# Altium PCB CAN-to-CAN.PcbDoc (part 2 of 2)
Units mil, origin at the board's own origin, x right, y up, seen from the top; angles counter-clockwise.
Board outline 4494 x 3585 mil, 4 copper layers (Top Layer, +5V, GND, Bottom Layer), stack 23.756 mil thick; 112 components, 87 nets, 365 pads, 245 vias.
Unrouted connection lines stored in the file: 3.
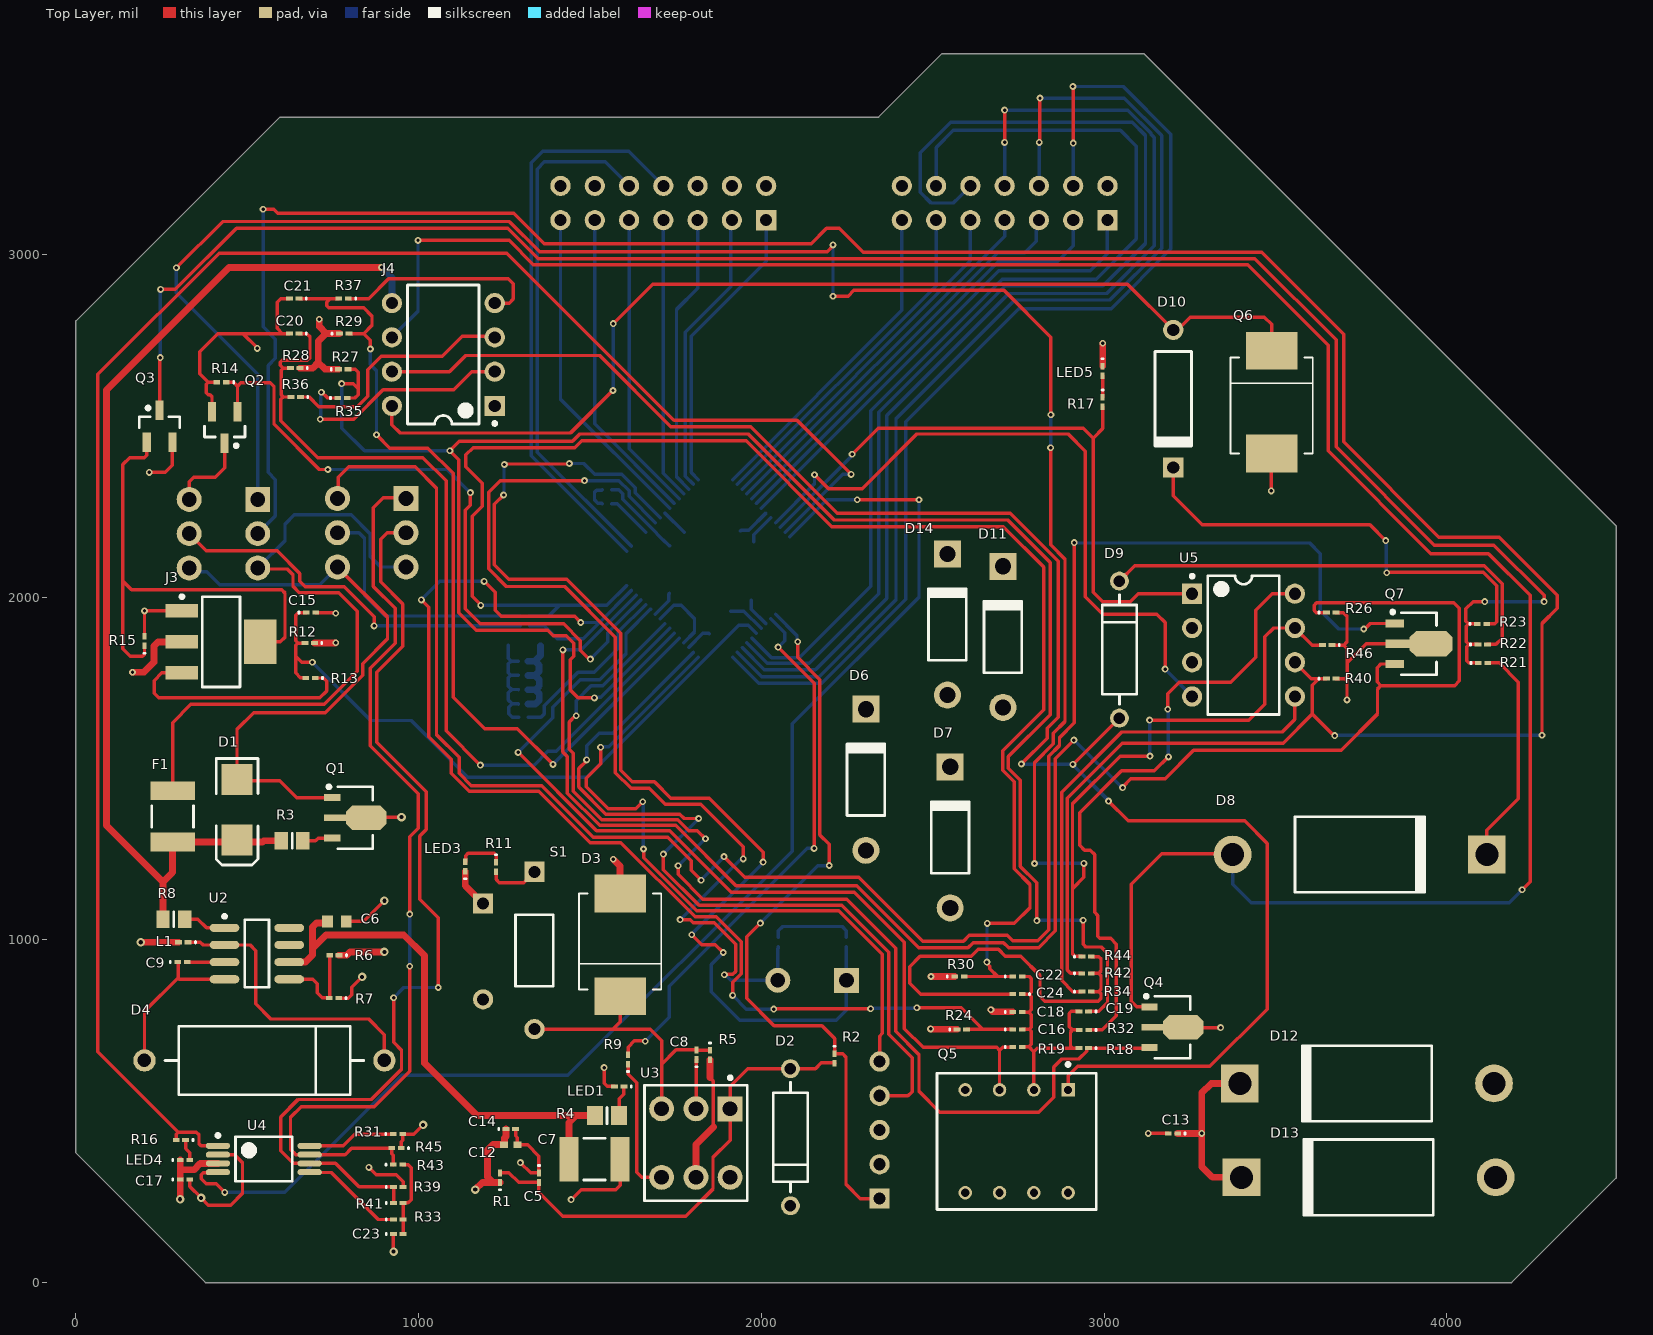
[diagram p0: Top Layer view]

## Polygon pours and split planes (outlines as drawn) (continued)
GND on GND (split plane): 3531.79,3141.79 4473.9,2199.68 4473.9,313.32 4180.68,20.1 386.32,20.1 20.1,386.32 20.1,2797.68 603.32,3380.9 2342,3380.9 2345.92,3381.29 2349.69,3382.43 2353.17,3384.29 2356.21,3386.79 2534.32,3564.9 3108.68,3564.9

## Silkscreen, mask and mechanical layers (free items; w line width, h text height)
Mechanical 1:
  lines w10: 0,378 378,0 468,0 4041,0 4189,0 4494,305 4494,1957 4494,1970 4494,2208 3546,3156 3117,3585 2526,3585 2342,3401 595,3401 0,2806 0,378

## Text inside footprints (layer, text, board x,y; h text height)
J1: Bottom Overlay "2" at 3129.98,3180 h30; Bottom Overlay "1" at 3129.98,3080 h30; Bottom Overlay "14" at 2329.98,3180 h30; Bottom Overlay "13" at 2329.98,3080 h30
J2: Bottom Overlay "2" at 2135,3183 h30; Bottom Overlay "1" at 2128,3072 h30; Bottom Overlay "14" at 1314,3194 h30; Bottom Overlay "13" at 1312,3065 h30